# Altium PCB Amp_8ch.PcbDoc
Units mil, origin at the board's own origin, x right, y up, seen from the top; angles counter-clockwise.
Board outline 8550 x 1625 mil, 2 copper layers (Top Layer, Bottom Layer); 61 components, 54 nets, 239 pads, 1 vias.
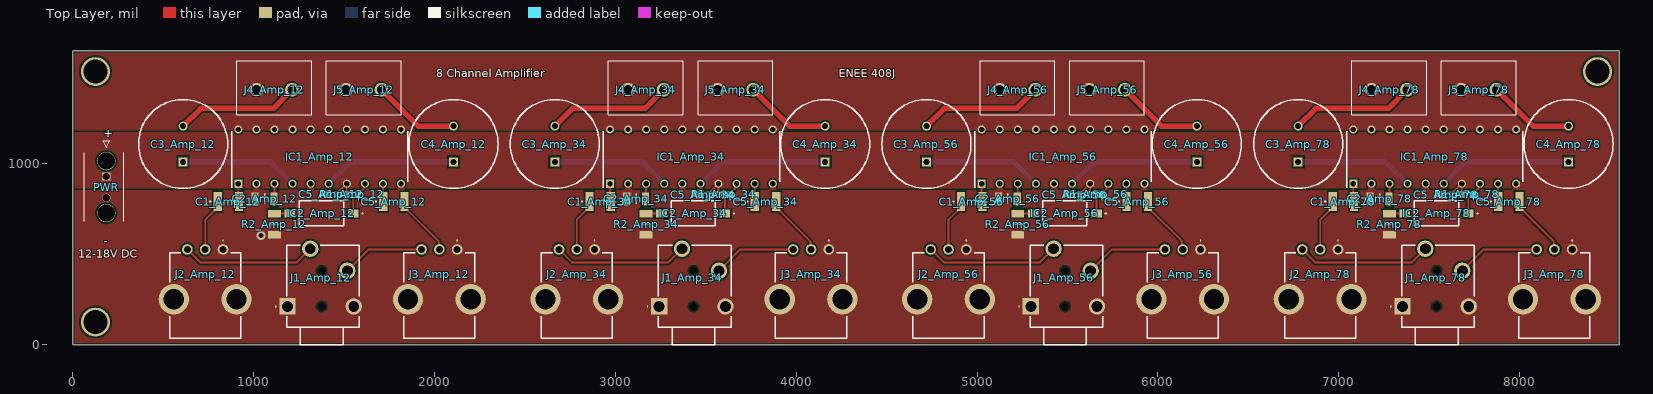
[diagram p0: Top Layer view]
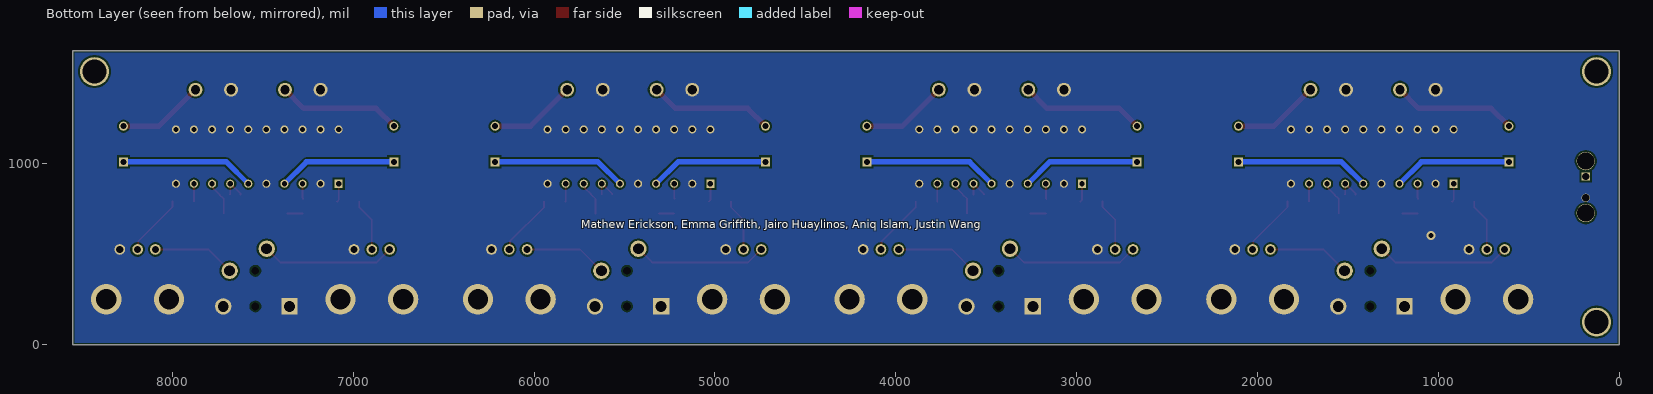
[diagram p1: Bottom Layer view, seen from below]
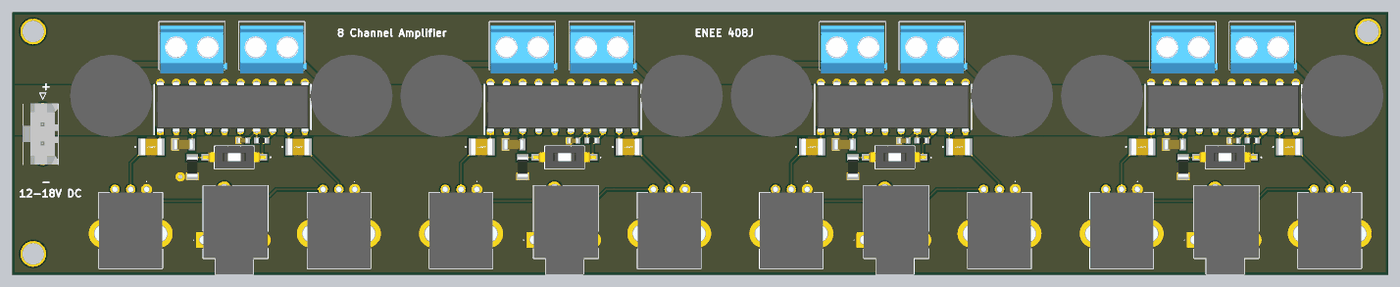
[diagram p2: 3D render of the assembled board from above, using the file's embedded part models]

## Layer stack, top to bottom
Top Solder: solder mask 0.4, Solder Resist, Dk 3.5
Top Layer: signal copper 1.4
Dielectric 1: dielectric 12.6, FR-4, Dk 4.8
Bottom Layer: signal copper 1.4
Bottom Solder: solder mask 0.4, Solder Resist, Dk 3.5

## Board outline
0,0 0,1625 8550,1625 8550,0

## Design rules (kind name [scope] priority, off if disabled: settings)
Clearance [All] p1: gap=10 ignorepadtopadclearanceinfootprint=TRUE except(0: Arc-Hole Track-Hole SMDPad-Hole THPad-Hole Via-Hole Fill-Hole Poly-Hole Region-Hole Text-Hole)
Height [All] p1: minheight=0 maxheight=1500 prefheight=500
PlaneConnect [All] p1: planeconnectstyle=Direct reliefexpansion=20 reliefentries=4 reliefconductorwidth=10 reliefairgap=10
PolygonConnect [All] p1: connectstyle=Direct reliefconductorwidth=10 reliefentries=4 polygonreliefangle="90 Angle" airgapwidth=10
RoomDefinition Amp_78 [InComponentClass('Amp_78')] p1: confinementstyle=ConfineIn formatcopy=TRUE lockcomponents=FALSE outline 8550,-105 8550,1620 6495,1620 6495,-105
RoomDefinition Amp_56 [InComponentClass('Amp_56')] p2: confinementstyle=ConfineIn formatcopy=TRUE lockcomponents=FALSE outline 6495,-105 6495,1620 4440,1620 4440,-105
RoomDefinition Amp_34 [InComponentClass('Amp_34')] p3: confinementstyle=ConfineIn formatcopy=TRUE lockcomponents=FALSE outline 4440,-105 4440,1620 2385,1620 2385,-105
RoomDefinition Amp_12 [InComponentClass('Amp_12')] p4: confinementstyle=ConfineIn formatcopy=TRUE lockcomponents=FALSE outline 2385,-105 2385,1620 330,1620 330,-105
RoutingVias [All] p1: holewidth=28 width=50 viastyle="Through Hole" minholewidth=28 minwidth=50 maxholewidth=28 maxwidth=50
SolderMaskExpansion [All] p1: expansion=4 istentingtop=FALSE
Width [All] p1: maxlimit=100 minlimit=10 preferedwidth=10
28 further rules are at their usual default settings.

## Classes and differential pairs
component class Amp_8ch: PWR
component class Amp_78: C1_Amp_78 C2_Amp_78 C3_Amp_78 C4_Amp_78 C5_Amp_78 IC1_Amp_78 IC2_Amp_78 J1_Amp_78 J2_Amp_78 J3_Amp_78 J4_Amp_78 J5_Amp_78 R1_Amp_78 R2_Amp_78
component class Amp_56: C1_Amp_56 C2_Amp_56 C3_Amp_56 C4_Amp_56 C5_Amp_56 IC1_Amp_56 IC2_Amp_56 J1_Amp_56 J2_Amp_56 J3_Amp_56 J4_Amp_56 J5_Amp_56 R1_Amp_56 R2_Amp_56
component class Amp_34: C1_Amp_34 C2_Amp_34 C3_Amp_34 C4_Amp_34 C5_Amp_34 IC1_Amp_34 IC2_Amp_34 J1_Amp_34 J2_Amp_34 J3_Amp_34 J4_Amp_34 J5_Amp_34 R1_Amp_34 R2_Amp_34
component class Amp_12: C1_Amp_12 C2_Amp_12 C3_Amp_12 C4_Amp_12 C5_Amp_12 IC1_Amp_12 IC2_Amp_12 J1_Amp_12 J2_Amp_12 J3_Amp_12 J4_Amp_12 J5_Amp_12 R1_Amp_12 R2_Amp_12
channel class Amp_2ch: Amp_12 Amp_34 Amp_56 Amp_78

## Components (designator, comment, footprint, x,y, rotation, side; value= is the part's Value field where it differs from the comment)
C1_Amp_12 "C1210C105K1RACTM" C1210 860,791.26 r0 top (schematic designator C1)
C1_Amp_34 "C1210C105K1RACTM" C1210 2915,791.26 r0 top (schematic designator C1)
C1_Amp_56 "C1210C105K1RACTM" C1210 4970,791.26 r0 top (schematic designator C1)
C1_Amp_78 "C1210C105K1RACTM" C1210 7025,791.26 r0 top (schematic designator C1)
C2_Amp_12 "GCM31CR71H225KA55L" CAPC3116X180N 1060,806.26 r0 top (schematic designator C2)
C2_Amp_34 "GCM31CR71H225KA55L" CAPC3116X180N 3115,806.26 r0 top (schematic designator C2)
C2_Amp_56 "GCM31CR71H225KA55L" CAPC3116X180N 5170,806.26 r0 top (schematic designator C2)
C2_Amp_78 "GCM31CR71H225KA55L" CAPC3116X180N 7225,806.26 r0 top (schematic designator C2)
C3_Amp_12 "EEU-FR1H471" CAPPRD500W65D1250H2200 610,1011.26 r90 top (schematic designator C3)
C3_Amp_34 "EEU-FR1H471" CAPPRD500W65D1250H2200 2665,1011.26 r90 top (schematic designator C3)
C3_Amp_56 "EEU-FR1H471" CAPPRD500W65D1250H2200 4720,1011.26 r90 top (schematic designator C3)
C3_Amp_78 "EEU-FR1H471" CAPPRD500W65D1250H2200 6775,1011.26 r90 top (schematic designator C3)
C4_Amp_12 "EEU-FR1H471" CAPPRD500W65D1250H2200 2105,1011.26 r90 top (schematic designator C4)
C4_Amp_34 "EEU-FR1H471" CAPPRD500W65D1250H2200 4160,1011.26 r90 top (schematic designator C4)
C4_Amp_56 "EEU-FR1H471" CAPPRD500W65D1250H2200 6215,1011.26 r90 top (schematic designator C4)
C4_Amp_78 "EEU-FR1H471" CAPPRD500W65D1250H2200 8270,1011.26 r90 top (schematic designator C4)
C5_Amp_12 "06035C105KAT2A" CAPC1608X90N 1430,831.87 r180 top (schematic designator C5)
C5_Amp_12 "C1210C105K1RACTM" C1210 1775,791.26 r0 top (schematic designator C5)
C5_Amp_34 "06035C105KAT2A" CAPC1608X90N 3485,830 r180 top (schematic designator C5)
C5_Amp_34 "C1210C105K1RACTM" C1210 3830,791.26 r0 top (schematic designator C5)
C5_Amp_56 "06035C105KAT2A" CAPC1608X90N 5540,830 r180 top (schematic designator C5)
C5_Amp_56 "C1210C105K1RACTM" C1210 5885,791.26 r0 top (schematic designator C5)
C5_Amp_78 "06035C105KAT2A" CAPC1608X90N 7595,830 r180 top (schematic designator C5)
C5_Amp_78 "C1210C105K1RACTM" C1210 7940,791.26 r0 top (schematic designator C5)
IC1_Amp_12 "TPA1517NE" DIP762W53P254L2400H508Q20N 1365,1040 r90 top (schematic designator IC1)
IC1_Amp_34 "TPA1517NE" DIP762W53P254L2400H508Q20N 3420,1040 r90 top (schematic designator IC1)
IC1_Amp_56 "TPA1517NE" DIP762W53P254L2400H508Q20N 5475,1040 r90 top (schematic designator IC1)
IC1_Amp_78 "TPA1517NE" DIP762W53P254L2400H508Q20N 7530,1040 r90 top (schematic designator IC1)
IC2_Amp_12 "DS04-254-1-01BK-SMT" DS04254101BKSMT 1375,726.26 r90 top (schematic designator IC2)
IC2_Amp_34 "DS04-254-1-01BK-SMT" DS04254101BKSMT 3430,726.26 r90 top (schematic designator IC2)
IC2_Amp_56 "DS04-254-1-01BK-SMT" DS04254101BKSMT 5485,726.26 r90 top (schematic designator IC2)
IC2_Amp_78 "DS04-254-1-01BK-SMT" DS04254101BKSMT 7540,726.26 r90 top (schematic designator IC2)
J1_Amp_12 "35RAPC5CHWNSN" 35RAPC5CHWNSN 1187.08,211.93 r90 top (schematic designator J1)
J1_Amp_34 "35RAPC5CHWNSN" 35RAPC5CHWNSN 3242.08,211.93 r90 top (schematic designator J1)
J1_Amp_56 "35RAPC5CHWNSN" 35RAPC5CHWNSN 5297.08,211.93 r90 top (schematic designator J1)
J1_Amp_78 "35RAPC5CHWNSN" 35RAPC5CHWNSN 7352.08,211.93 r90 top (schematic designator J1)
J2_Amp_12 "PTV09A-4030F-A103" PTV09A4030FA103 830.2,526.85 r180 top (schematic designator J2)
J2_Amp_34 "PTV09A-4030F-A103" PTV09A4030FA103 2885.2,526.85 r180 top (schematic designator J2)
J2_Amp_56 "PTV09A-4030F-A103" PTV09A4030FA103 4940.2,526.85 r180 top (schematic designator J2)
J2_Amp_78 "PTV09A-4030F-A103" PTV09A4030FA103 6995.2,526.85 r180 top (schematic designator J2)
J3_Amp_12 "PTV09A-4030F-A103" PTV09A4030FA103 2125.2,526.85 r180 top (schematic designator J3)
J3_Amp_34 "PTV09A-4030F-A103" PTV09A4030FA103 4180.2,526.85 r180 top (schematic designator J3)
J3_Amp_56 "PTV09A-4030F-A103" PTV09A4030FA103 6235.2,526.85 r180 top (schematic designator J3)
J3_Amp_78 "PTV09A-4030F-A103" PTV09A4030FA103 8290.2,526.85 r180 top (schematic designator J3)
J4_Amp_12 "TB002-500-02BE" TB00250002BE 1015,1410 r0 top (schematic designator J4)
J4_Amp_34 "TB002-500-02BE" TB00250002BE 3070,1410 r0 top (schematic designator J4)
J4_Amp_56 "TB002-500-02BE" TB00250002BE 5125,1410 r0 top (schematic designator J4)
J4_Amp_78 "TB002-500-02BE" TB00250002BE 7180,1410 r0 top (schematic designator J4)
J5_Amp_12 "TB002-500-02BE" TB00250002BE 1510,1410 r0 top (schematic designator J5)
J5_Amp_34 "TB002-500-02BE" TB00250002BE 3565,1410 r0 top (schematic designator J5)
J5_Amp_56 "TB002-500-02BE" TB00250002BE 5620,1410 r0 top (schematic designator J5)
J5_Amp_78 "TB002-500-02BE" TB00250002BE 7675,1410 r0 top (schematic designator J5)
PWR "43650-0220" 43650-02YY_18192063 185,930.35 r90 top
R1_Amp_12 "CRGCQ0603J10K" RESC1608X55N 1545,831.26 r0 top (schematic designator R1)
R1_Amp_34 "CRGCQ0603J10K" RESC1608X55N 3600,831.26 r0 top (schematic designator R1)
R1_Amp_56 "CRGCQ0603J10K" RESC1608X55N 5655,831.26 r0 top (schematic designator R1)
R1_Amp_78 "CRGCQ0603J10K" RESC1608X55N 7710,831.26 r0 top (schematic designator R1)
R2_Amp_12 "CRCW120676K8FKEA" RESC3216X60N 1115,666.26 r90 top (schematic designator R2)
R2_Amp_34 "CRCW120676K8FKEA" RESC3216X60N 3170,666.26 r90 top (schematic designator R2)
R2_Amp_56 "CRCW120676K8FKEA" RESC3216X60N 5225,666.26 r90 top (schematic designator R2)
R2_Amp_78 "CRCW120676K8FKEA" RESC3216X60N 7280,666.26 r90 top (schematic designator R2)

## Footprints (in the part's own frame and the unit in brackets; to place one, negate y for a bottom-side part, rotate by r counter-clockwise, add the part's x,y. Pads: shape width x height; smd on the part's side, far side on the other; paste and mask are expansions set on the pad)
35RAPC5CHWNSN [mm]
  rect 2.295x2.295 hole 1.53: 1(0,0)
  round 2.295 hole 1.53: 2(5,-8.4) 3(8.1,-3.2) 4(0,-9.3)
  round 0.55 hole 1.1 unplated: MH1(0,-4.8) MH2(5,-4.8)
  silkscreen extent -5.4,-10.1 8.6,1.7, body extent -5.4,-10.1 8.76,0.66, height 5.6
43650-02YY_18192063 [mm]
  rect 1.17x1.17 hole 1.02: 1(0,0)
  round 1.17 hole 1.02: 2(-3,0)
  round 2.56 hole 2.41: 3(2.15,0) 4(-5.15,0)
  silkscreen extent -6.32,-2.47 5,3.1, body extent -6.29,-2.41 3.35,3.19, height 9.82
C1210 [mm]
  rect 1.15x2.7 smd: 1(-1.5,0) 2(1.5,0)
  silkscreen extent -2.6,-0.05 -2.5,0.05, body extent -1.7,-1.35 1.7,1.35, height 1.4
CAPC1608X90N [mm]
  rect 0.75x0.94 smd: 1(-0.7,0) 2(0.7,0)
  body extent -0.8,-0.4 0.8,0.4, height 0.9
CAPC3116X180N [mm]
  rect 1.01x1.82 smd: 1(-1.32,0) 2(1.32,0)
  silkscreen extent 0,-0.7 0,0.7, body extent -1.55,-0.8 1.55,0.8, height 1.8
CAPPRD500W65D1250H2200 [mm]
  rect 1.275x1.275 hole 0.85: 1(0,0)
  round 1.275 hole 0.85: 2(5,0)
  silkscreen extent -3.75,-6.25 8.75,6.25, body extent -3.99,-6.5 9,6.5, height 22
DIP762W53P254L2400H508Q20N [mil]
  rect 44.61x44.61 hole 28.86: 1(-150,450)
  round 44.61 hole 28.86: 2(-150,350) 3(-150,250) 4(-150,150) 5(-150,50) 6(-150,-50) 7(-150,-150) 8(-150,-250) 9(-150,-350) 10(-150,-450) 11(150,-450) 12(150,-350) 13(150,-250) 14(150,-150) 15(150,-50) 16(150,50) 17(150,150) 18(150,250) 19(150,350) 20(150,450)
  silkscreen extent -172,-488 140,488, body extent -155,-472 155,472, height 200
DS04254101BKSMT [mm]
  rect 1.1x1.5 smd: 1(0,-4.45) 2(0,4.45)
  silkscreen extent -1.77,-5.8 1.77,3.1, body extent -1.73,-4.97 1.81,4.93, height 4.53
PTV09A4030FA103 [mm]
  round 1.5 hole 1: 1(0,0) 2(2.5,0) 3(5,0)
  round 4.26 hole 2.84: MH1(-1.9,7) MH2(6.9,7)
  silkscreen extent -2.5,-1.3 7.5,12.5, body extent -3.22,-0.4 8.22,12.5, height 30.6
RESC1608X55N [mm]
  rect 0.9x0.95 smd: 1(-0.75,0) 2(0.75,0)
  body extent -0.77,-0.4 0.77,0.4, height 0.55
RESC3216X60N [mm]
  rect 1.05x1.8 smd: 1(-1.5,0) 2(1.5,0)
  silkscreen extent 0,-0.7 0,0.7, body extent -1.58,-0.8 1.58,0.8, height 0.6
TB00250002BE [mm]
  round 1.95 hole 1.3: 1(0,0) 2(5,0)
  silkscreen extent -2.75,-3.5 7.75,4.1, body extent -2.51,-4.08 7.99,3.52, height 9.99

## Part data
C1_Amp_12 C1_Amp_34 C1_Amp_56 C1_Amp_78 C5_Amp_12 C5_Amp_34 C5_Amp_56 C5_Amp_78: "Capacitor", Manufacturer_Name=KEMET, Mouser Part Number=80-C1210C105K1RACTM, Arrow Part Number=C1210C105K1RACTM, Arrow Price/Stock=https://www.arrow.com/en/products/c1210c105k1ractm/kemet-corporation?region=nac, Datasheet Link=https://content.kemet.com/datasheets/KEM_C1002_X7R_SMD.pdf, Manufacturer_Part_Number=C1210C105K1RACTM, Mouser Price/Stock=https://www.mouser.co.uk/ProductDetail/KEMET/C1210C105K1RACTM?qs=gt1LBUVyoHkoe6sHAWmw2Q%3D%3D
C2_Amp_12 C2_Amp_34 C2_Amp_56 C2_Amp_78: "Capacitor", Manufacturer_Name="Murata Electronics", Mouser Part Number=81-GCM31CR71H225KA5L, Arrow Part Number=GCM31CR71H225KA55L, Arrow Price/Stock=https://www.arrow.com/en/products/gcm31cr71h225ka55l/murata-manufacturing?region=nac, Datasheet Link=https://psearch.en.murata.com/capacitor/product/GCM31CR71H225KA55%23.html, Height=1.8mm, Manufacturer_Part_Number=GCM31CR71H225KA55L, Mouser Price/Stock=https://www.mouser.co.uk/ProductDetail/Murata-Electronics/GCM31CR71H225KA55L?qs=aEuGZpxfbxXH69FledLqTA%3D%3D
C3_Amp_12 C3_Amp_34 C3_Amp_56 C3_Amp_78 C4_Amp_12 C4_Amp_34 C4_Amp_56 C4_Amp_78: "Capacitor Polarised", Manufacturer_Name=Panasonic, Mouser Part Number=667-EEU-FR1H471, Datasheet Link=http://industrial.panasonic.com/cdbs/www-data/pdf/RDF0000/ABA0000C1259.pdf, Height=22mm, Manufacturer_Part_Number=EEU-FR1H471, Mouser Price/Stock=https://www.mouser.co.uk/ProductDetail/Panasonic/EEU-FR1H471?qs=Uw8ySfEHS7JTqHno%252BakBKA%3D%3D
C5_Amp_12 C5_Amp_34 C5_Amp_56 C5_Amp_78: "Capacitor", Manufacturer_Name=AVX, Mouser Part Number=581-06035C105KAT2A, Arrow Part Number=06035C105KAT2A, Arrow Price/Stock=https://www.arrow.com/en/products/06035c105kat2a/avx, Datasheet Link=https://componentsearchengine.com/Datasheets/1/06031A100FAT2A.pdf, Height=0.9mm, Manufacturer_Part_Number=06035C105KAT2A, Mouser Price/Stock=https://www.mouser.co.uk/ProductDetail/AVX/06035C105KAT2A/?qs=%252BdQmOuGyFcGCdIIWh6fU7Q%3D%3D
IC1_Amp_12 IC1_Amp_34 IC1_Amp_56 IC1_Amp_78: "Integrated Circuit", Manufacturer_Name="Texas Instruments", Mouser Part Number=595-TPA1517NE, Arrow Part Number=TPA1517NE, Arrow Price/Stock=https://www.arrow.com/en/products/tpa1517ne/texas-instruments?region=nac, Datasheet Link=http://www.ti.com/lit/gpn/tpa1517, Height=5.08mm, Manufacturer_Part_Number=TPA1517NE, Mouser Price/Stock=https://www.mouser.co.uk/ProductDetail/Texas-Instruments/TPA1517NE?qs=5nGYs9Do7G0VZ0L%2FTRBsQw%3D%3D
IC2_Amp_12 IC2_Amp_34 IC2_Amp_56 IC2_Amp_78: "Integrated Circuit", Manufacturer_Name="CUI Devices", Mouser Part Number=490-DS04254101BK-SMT, Arrow Part Number=DS04-254-1-01BK-SMT, Arrow Price/Stock=https://www.arrow.com/en/products/ds04-254-1-01bk-smt/cui-devices?region=nac, Datasheet Link=https://www.cuidevices.com/product/resource/digikeypdf/ds04-254-smt.pdf, Height=4.3mm, Manufacturer_Part_Number=DS04-254-1-01BK-SMT, Mouser Price/Stock=https://www.mouser.co.uk/ProductDetail/CUI-Devices/DS04-254-1-01BK-SMT?qs=wnTfsH77Xs40YtszDww4tg%3D%3D
J1_Amp_12 J1_Amp_34 J1_Amp_56 J1_Amp_78: "Connector", Manufacturer_Name=Switchcraft, Mouser Part Number=502-35RAPC5CHWNSN, Datasheet Link=https://www.switchcraft.com/assets/1/6/35RAPC5CHWNSN_CD.pdf, Height=5.5mm, Manufacturer_Part_Number=35RAPC5CHWNSN, Mouser Price/Stock=https://www.mouser.co.uk/ProductDetail/Switchcraft/35RAPC5CHWNSN?qs=tlsG%2FOw5FFhDrydSbX%252BonQ%3D%3D
J2_Amp_12 J2_Amp_34 J2_Amp_56 J2_Amp_78 J3_Amp_12 J3_Amp_34 J3_Amp_56 J3_Amp_78: "Connector", Manufacturer_Name=Bourns, Mouser Part Number=652-PTV09A-4030FA103, Datasheet Link=https://componentsearchengine.com/Datasheets/1/PTV09A-4030F-A103.pdf, Height=30.5mm, Manufacturer_Part_Number=PTV09A-4030F-A103, Mouser Price/Stock=https://www.mouser.co.uk/ProductDetail/Bourns/PTV09A-4030F-A103?qs=BJlw7L4Cy79aPKOjvTfpfw%3D%3D
J4_Amp_12 J4_Amp_34 J4_Amp_56 J4_Amp_78 J5_Amp_12 J5_Amp_34 J5_Amp_56 J5_Amp_78: "Connector", Manufacturer_Name="CUI Devices", Mouser Part Number=490-TB002-500-02BE, Arrow Part Number=TB002-500-02BE, Arrow Price/Stock=https://www.arrow.com/en/products/tb002-500-02be/cui-devices?region=nac, Datasheet Link=https://eu.mouser.com/datasheet/2/670/tb002_500-1550579.pdf, Height=10.4mm, Manufacturer_Part_Number=TB002-500-02BE, Mouser Price/Stock=https://www.mouser.co.uk/ProductDetail/CUI-Devices/TB002-500-02BE?qs=vLWxofP3U2x9716kcgva%2Fw%3D%3D
PWR: "Connector", Manufacturer_Name=Molex, Mouser Part Number=538-43650-0220, Datasheet Link=https://www.molex.com/pdm_docs/sd/436500218_sd.pdf, Height=9.9mm, Manufacturer_Part_Number=43650-0220, Mouser Price/Stock=https://www.mouser.co.uk/ProductDetail/Molex/43650-0220?qs=zhePCb1yaFPcr0mO6F%252BhcQ%3D%3D
R1_Amp_12 R1_Amp_34 R1_Amp_56 R1_Amp_78: "Resistor", Manufacturer_Name="TE Connectivity", Mouser Part Number=279-CRGCQ0603J10K, Datasheet Link=https://4donline.ihs.com/images/VipMasterIC/IC/TYEL/TYEL-S-A0004929575/TYEL-S-A0004929575-1.pdf?hkey=52A5661711E402568146F3353EA87419, Height=0.55mm, Manufacturer_Part_Number=CRGCQ0603J10K, Mouser Price/Stock=https://www.mouser.co.uk/ProductDetail/TE-Connectivity-Holsworthy/CRGCQ0603J10K?qs=wUXugUrL1qzulhGjUR%2FJ4g%3D%3D
R2_Amp_12 R2_Amp_34 R2_Amp_56 R2_Amp_78: "Resistor", Manufacturer_Name=Vishay, Mouser Part Number=71-CRCW1206-76.8K-E3, Datasheet Link=http://componentsearchengine.com/Datasheets/1/CRCW120676K8FKEA.pdf, Height=0.6mm, Manufacturer_Part_Number=CRCW120676K8FKEA, Mouser Price/Stock=https://www.mouser.com/Search/Refine.aspx?Keyword=71-CRCW1206-76.8K-E3

## Free pads (board coordinates)
  round 160 hole 134: 2(125,125) 2(125,1510) 2(8430,1510)

## Via types
v1: diameter 50, hole 28, Top Layer to Bottom Layer, 1 vias

## Nets (pads, with @x,y where several pads share a name; then routed paths per layer and width w, separated by ;. In a path a pad name is that pad's centre, name@x,y a point inside that pad or via, vN(x,y) a via of type N, cw(c..) or ccw(c..) an arc to the next point about the centre after c; other vN are vias at no path point)
+12: C5_Amp_12.1@1457.56,831.87 C5_Amp_34.1@3512.56,830 C5_Amp_56.1@5567.56,830 C5_Amp_78.1@7622.56,830 IC1_Amp_12.7 IC1_Amp_34.7 IC1_Amp_56.7 IC1_Amp_78.7 PWR.1 R1_Amp_12.1 R1_Amp_34.1 R1_Amp_56.1 R1_Amp_78.1 | length 573.7
  Top Layer w10: C5_Amp_12.1@1457.56,830 1457.56,833.74 1513.82,890 IC1_Amp_12.7 1515,831.73 R1_Amp_12.1 ; C5_Amp_34.1@3512.56,830 3512.56,833.74 3568.82,890 IC1_Amp_34.7 3570,831.73 R1_Amp_34.1 ; C5_Amp_56.1@5567.56,830 5567.56,833.74 5623.82,890 IC1_Amp_56.7 5625,831.73 R1_Amp_56.1 ; C5_Amp_78.1@7622.56,830 7622.56,833.74 7678.82,890 IC1_Amp_78.7 7680,831.73 R1_Amp_78.1
GND: C2_Amp_12.1 C2_Amp_34.1 C2_Amp_56.1 C2_Amp_78.1 C5_Amp_12.2@1402.44,831.87 C5_Amp_34.2@3457.44,830 C5_Amp_56.2@5512.44,830 C5_Amp_78.2@7567.44,830 IC1_Amp_12.2 IC1_Amp_12.5 IC1_Amp_12.10 IC1_Amp_12.11 IC1_Amp_12.12 IC1_Amp_12.13 IC1_Amp_12.14 IC1_Amp_12.15 IC1_Amp_12.16 IC1_Amp_12.17 IC1_Amp_12.18 IC1_Amp_12.19 IC1_Amp_12.20 IC1_Amp_34.2 IC1_Amp_34.5 IC1_Amp_34.10 IC1_Amp_34.11 IC1_Amp_34.12 IC1_Amp_34.13 IC1_Amp_34.14 IC1_Amp_34.15 IC1_Amp_34.16 IC1_Amp_34.17 IC1_Amp_34.18 IC1_Amp_34.19 IC1_Amp_34.20 IC1_Amp_56.2 IC1_Amp_56.5 IC1_Amp_56.10 IC1_Amp_56.11 IC1_Amp_56.12 IC1_Amp_56.13 IC1_Amp_56.14 IC1_Amp_56.15 IC1_Amp_56.16 IC1_Amp_56.17 IC1_Amp_56.18 IC1_Amp_56.19 IC1_Amp_56.20 IC1_Amp_78.2 IC1_Amp_78.5 IC1_Amp_78.10 IC1_Amp_78.11 IC1_Amp_78.12 IC1_Amp_78.13 IC1_Amp_78.14 IC1_Amp_78.15 IC1_Amp_78.16 IC1_Amp_78.17 IC1_Amp_78.18 IC1_Amp_78.19 IC1_Amp_78.20 J1_Amp_12.1 J1_Amp_12.4 J1_Amp_34.1 J1_Amp_34.4 J1_Amp_56.1 J1_Amp_56.4 J1_Amp_78.1 J1_Amp_78.4 J2_Amp_12.1 J2_Amp_12.MH1 J2_Amp_12.MH2 J2_Amp_34.1 J2_Amp_34.MH1 J2_Amp_34.MH2 J2_Amp_56.1 J2_Amp_56.MH1 J2_Amp_56.MH2 J2_Amp_78.1 J2_Amp_78.MH1 J2_Amp_78.MH2 J3_Amp_12.1 J3_Amp_12.MH1 J3_Amp_12.MH2 J3_Amp_34.1 J3_Amp_34.MH1 J3_Amp_34.MH2 J3_Amp_56.1 J3_Amp_56.MH1 J3_Amp_56.MH2 J3_Amp_78.1 J3_Amp_78.MH1 J3_Amp_78.MH2 J4_Amp_12.1 J4_Amp_34.1 J4_Amp_56.1 J4_Amp_78.1 J5_Amp_12.1 J5_Amp_34.1 J5_Amp_56.1 J5_Amp_78.1 PWR.2 R2_Amp_12.1 R2_Amp_34.1 R2_Amp_56.1 R2_Amp_78.1
  other v1: 1040,605
NetC1_Amp_12_1: C1_Amp_12.1 J2_Amp_12.2 | length 293.1
  Top Layer w10: J2_Amp_12.2 731.77,691.57 800.94,760.75 C1_Amp_12.1
NetC1_Amp_12_2: C1_Amp_12.2 IC1_Amp_12.1 | length 102.5
  Top Layer w10: IC1_Amp_12.1 915,800.32 C1_Amp_12.2@924.06,791.26
NetC1_Amp_34_1: C1_Amp_34.1 J2_Amp_34.2 | length 293.1
  Top Layer w10: J2_Amp_34.2 2786.77,691.57 2855.94,760.75 C1_Amp_34.1
NetC1_Amp_34_2: C1_Amp_34.2 IC1_Amp_34.1 | length 102.5
  Top Layer w10: IC1_Amp_34.1 2970,800.32 C1_Amp_34.2@2979.06,791.26
NetC1_Amp_56_1: C1_Amp_56.1 J2_Amp_56.2 | length 293.1
  Top Layer w10: J2_Amp_56.2 4841.77,691.57 4910.94,760.75 C1_Amp_56.1
NetC1_Amp_56_2: C1_Amp_56.2 IC1_Amp_56.1 | length 102.5
  Top Layer w10: IC1_Amp_56.1 5025,800.32 C1_Amp_56.2@5034.06,791.26
NetC1_Amp_78_1: C1_Amp_78.1 J2_Amp_78.2 | length 293.1
  Top Layer w10: J2_Amp_78.2 6896.77,691.57 6965.94,760.75 C1_Amp_78.1
NetC1_Amp_78_2: C1_Amp_78.2 IC1_Amp_78.1 | length 102.5
  Top Layer w10: IC1_Amp_78.1 7080,800.32 C1_Amp_78.2@7089.06,791.26
NetC2_Amp_12_2: C2_Amp_12.2 IC1_Amp_12.3 | length 85
  Top Layer w10: C2_Amp_12.2 1115,809.29 IC1_Amp_12.3
NetC2_Amp_34_2: C2_Amp_34.2 IC1_Amp_34.3 | length 85
  Top Layer w10: C2_Amp_34.2 3170,809.29 IC1_Amp_34.3
NetC2_Amp_56_2: C2_Amp_56.2 IC1_Amp_56.3 | length 85
  Top Layer w10: C2_Amp_56.2 5225,809.29 IC1_Amp_56.3
NetC2_Amp_78_2: C2_Amp_78.2 IC1_Amp_78.3 | length 85
  Top Layer w10: C2_Amp_78.2 7280,809.29 IC1_Amp_78.3
NetC3_Amp_12_1: C3_Amp_12.1 IC1_Amp_12.4 | length 655.2
  Bottom Layer w30: C3_Amp_12.1 1093.74,1011.26 IC1_Amp_12.4
NetC3_Amp_12_2: C3_Amp_12.2 J4_Amp_12.2 | length 685.5
  Top Layer w30: C3_Amp_12.2 708.4,1306.51 1108.36,1306.51 J4_Amp_12.2
NetC3_Amp_34_1: C3_Amp_34.1 IC1_Amp_34.4 | length 655.2
  Bottom Layer w30: C3_Amp_34.1 3148.74,1011.26 IC1_Amp_34.4
NetC3_Amp_34_2: C3_Amp_34.2 J4_Amp_34.2 | length 685.5
  Top Layer w30: C3_Amp_34.2 2763.4,1306.51 3163.36,1306.51 J4_Amp_34.2
NetC3_Amp_56_1: C3_Amp_56.1 IC1_Amp_56.4 | length 655.2
  Bottom Layer w30: C3_Amp_56.1 5203.74,1011.26 IC1_Amp_56.4
NetC3_Amp_56_2: C3_Amp_56.2 J4_Amp_56.2 | length 685.5
  Top Layer w30: C3_Amp_56.2 4818.4,1306.51 5218.36,1306.51 J4_Amp_56.2
NetC3_Amp_78_1: C3_Amp_78.1 IC1_Amp_78.4 | length 655.2
  Bottom Layer w30: C3_Amp_78.1 7258.74,1011.26 IC1_Amp_78.4
NetC3_Amp_78_2: C3_Amp_78.2 J4_Amp_78.2 | length 685.5
  Top Layer w30: C3_Amp_78.2 6873.4,1306.51 7273.36,1306.51 J4_Amp_78.2
NetC4_Amp_12_1: C4_Amp_12.1 IC1_Amp_12.6 | length 740.2
  Bottom Layer w30: IC1_Amp_12.6 1536.26,1011.26 C4_Amp_12.1
NetC4_Amp_12_2: C4_Amp_12.2 J5_Amp_12.2 | length 481.8
  Top Layer w30: J5_Amp_12.2 1908.74,1208.11 C4_Amp_12.2
NetC4_Amp_34_1: C4_Amp_34.1 IC1_Amp_34.6 | length 740.2
  Bottom Layer w30: IC1_Amp_34.6 3591.26,1011.26 C4_Amp_34.1
NetC4_Amp_34_2: C4_Amp_34.2 J5_Amp_34.2 | length 481.8
  Top Layer w30: J5_Amp_34.2 3963.74,1208.11 C4_Amp_34.2
NetC4_Amp_56_1: C4_Amp_56.1 IC1_Amp_56.6 | length 740.2
  Bottom Layer w30: IC1_Amp_56.6 5646.26,1011.26 C4_Amp_56.1
NetC4_Amp_56_2: C4_Amp_56.2 J5_Amp_56.2 | length 481.8
  Top Layer w30: J5_Amp_56.2 6018.74,1208.11 C4_Amp_56.2
NetC4_Amp_78_1: C4_Amp_78.1 IC1_Amp_78.6 | length 740.2
  Bottom Layer w30: IC1_Amp_78.6 7701.26,1011.26 C4_Amp_78.1
NetC4_Amp_78_2: C4_Amp_78.2 J5_Amp_78.2 | length 481.8
  Top Layer w30: J5_Amp_78.2 8073.74,1208.11 C4_Amp_78.2
NetC5_Amp_12_1: C5_Amp_12.1@1715.94,791.26 IC1_Amp_12.9 | length 99.1
  Top Layer w10: IC1_Amp_12.9 1715,792.2 C5_Amp_12.1@1715.94,791.26
NetC5_Amp_12_2: C5_Amp_12.2@1834.06,791.26 J3_Amp_12.2 | length 344.2
  Top Layer w10: C5_Amp_12.2@1834.06,791.26 1834.06,760.75 2023.43,571.38 2023.43,530.2 J3_Amp_12.2
NetC5_Amp_34_1: C5_Amp_34.1@3770.94,791.26 IC1_Amp_34.9 | length 99.1
  Top Layer w10: IC1_Amp_34.9 3770,792.2 C5_Amp_34.1@3770.94,791.26
NetC5_Amp_34_2: C5_Amp_34.2@3889.06,791.26 J3_Amp_34.2 | length 344.2
  Top Layer w10: C5_Amp_34.2@3889.06,791.26 3889.06,760.75 4078.43,571.38 4078.43,530.2 J3_Amp_34.2
NetC5_Amp_56_1: C5_Amp_56.1@5825.94,791.26 IC1_Amp_56.9 | length 99.1
  Top Layer w10: IC1_Amp_56.9 5825,792.2 C5_Amp_56.1@5825.94,791.26
NetC5_Amp_56_2: C5_Amp_56.2@5944.06,791.26 J3_Amp_56.2 | length 344.2
  Top Layer w10: C5_Amp_56.2@5944.06,791.26 5944.06,760.75 6133.43,571.38 6133.43,530.2 J3_Amp_56.2
NetC5_Amp_78_1: C5_Amp_78.1@7880.94,791.26 IC1_Amp_78.9 | length 99.1
  Top Layer w10: IC1_Amp_78.9 7880,792.2 C5_Amp_78.1@7880.94,791.26
NetC5_Amp_78_2: C5_Amp_78.2@7999.06,791.26 J3_Amp_78.2 | length 344.2
  Top Layer w10: C5_Amp_78.2@7999.06,791.26 7999.06,760.75 8188.43,571.38 8188.43,530.2 J3_Amp_78.2
NetIC1_Amp_12_8: IC1_Amp_12.8 IC2_Amp_12.1 R1_Amp_12.2 | length 190.6
  Top Layer w10: IC2_Amp_12.1 1550.2,805.94 1574.53,830.28 R1_Amp_12.2 1574.53,832.24 1608.38,866.09 1608.38,883.38 IC1_Amp_12.8
NetIC1_Amp_34_8: IC1_Amp_34.8 IC2_Amp_34.1 R1_Amp_34.2 | length 190.6
  Top Layer w10: IC2_Amp_34.1 3605.2,805.94 3629.53,830.28 R1_Amp_34.2 3629.53,832.24 3663.38,866.09 3663.38,883.38 IC1_Amp_34.8
NetIC1_Amp_56_8: IC1_Amp_56.8 IC2_Amp_56.1 R1_Amp_56.2 | length 190.6
  Top Layer w10: IC2_Amp_56.1 5660.2,805.94 5684.53,830.28 R1_Amp_56.2 5684.53,832.24 5718.38,866.09 5718.38,883.38 IC1_Amp_56.8
NetIC1_Amp_78_8: IC1_Amp_78.8 IC2_Amp_78.1 R1_Amp_78.2 | length 190.6
  Top Layer w10: IC2_Amp_78.1 7715.2,805.94 7739.53,830.28 R1_Amp_78.2 7739.53,832.24 7773.38,866.09 7773.38,883.38 IC1_Amp_78.8
NetIC2_Amp_12_2: IC2_Amp_12.2 R2_Amp_12.2 | length 85.2
  Top Layer w10: R2_Amp_12.2 1115.94,726.26 IC2_Amp_12.2
NetIC2_Amp_34_2: IC2_Amp_34.2 R2_Amp_34.2 | length 85.2
  Top Layer w10: R2_Amp_34.2 3170.94,726.26 IC2_Amp_34.2
NetIC2_Amp_56_2: IC2_Amp_56.2 R2_Amp_56.2 | length 85.2
  Top Layer w10: R2_Amp_56.2 5225.94,726.26 IC2_Amp_56.2
NetIC2_Amp_78_2: IC2_Amp_78.2 R2_Amp_78.2 | length 85.2
  Top Layer w10: R2_Amp_78.2 7280.94,726.26 IC2_Amp_78.2
NetJ1_Amp_12_2: J1_Amp_12.2 J3_Amp_12.3 | length 459.5
  Top Layer w10: J1_Amp_12.2 1635.87,526.85 J3_Amp_12.3
NetJ1_Amp_12_3: J1_Amp_12.3 J2_Amp_12.3 | length 740.9
  Top Layer w10: J2_Amp_12.3 705.2,455 1237.24,455 J1_Amp_12.3
NetJ1_Amp_34_2: J1_Amp_34.2 J3_Amp_34.3 | length 459.5
  Top Layer w10: J1_Amp_34.2 3690.87,526.85 J3_Amp_34.3
NetJ1_Amp_34_3: J1_Amp_34.3 J2_Amp_34.3 | length 740.9
  Top Layer w10: J2_Amp_34.3 2760.2,455 3292.24,455 J1_Amp_34.3
NetJ1_Amp_56_2: J1_Amp_56.2 J3_Amp_56.3 | length 459.5
  Top Layer w10: J1_Amp_56.2 5745.87,526.85 J3_Amp_56.3
NetJ1_Amp_56_3: J1_Amp_56.3 J2_Amp_56.3 | length 740.9
  Top Layer w10: J2_Amp_56.3 4815.2,455 5347.24,455 J1_Amp_56.3
NetJ1_Amp_78_2: J1_Amp_78.2 J3_Amp_78.3 | length 459.5
  Top Layer w10: J1_Amp_78.2 7800.87,526.85 J3_Amp_78.3
NetJ1_Amp_78_3: J1_Amp_78.3 J2_Amp_78.3 | length 740.9
  Top Layer w10: J2_Amp_78.3 6870.2,455 7402.24,455 J1_Amp_78.3
pads on no net: J1_Amp_12.MH1 J1_Amp_12.MH2 J1_Amp_34.MH1 J1_Amp_34.MH2 J1_Amp_56.MH1 J1_Amp_56.MH2 J1_Amp_78.MH1 J1_Amp_78.MH2 PWR.3 PWR.4

## Polygon pours and split planes (outlines as drawn)
GND on Top Layer "GND_L01_P002" (solid, pour order 2): 10,10 10,1615 8540,1615 8540,10
+12 on Top Layer "+12_L01_P001" (solid, pour order 1): 10,1175 8010,1175 8010,865 10,865
GND on Bottom Layer "GND_L02_P000" (solid, pour order 0): 10,10 10,1615 8540,1615 8540,10

## Silkscreen, mask and mechanical layers (free items; w line width, h text height)
Top Overlay:
  text "8 Channel Amplifier" at 2010,1480 h45
  text "ENEE 408J" at 4235,1480 h45
  text "+" at 170,1147.5 h45
  text "-" at 170,552.51 h45
  text "12-18V DC" at 30,480 h45
Bottom Overlay:
  text "Mathew Erickson, Emma Griffith, Jairo Huaylinos, Aniq Islam, Justin Wang" at 5740,645 h45
Board Shape:
  the board outline again, w10